# EAGLE board MCU_Power_PCB_Rev1 (EAGLE 9.6.2)

No outline drawn. Coordinates in mm, seen from the top.
Copper layers (1*16): Top 0.035mm / dielectric 1.5mm / Bottom 0.035mm
Design rules "default": minimum track width 6mil, minimum drill 0.35mm, track to track 6mil, track to pad 6mil, pad to pad 6mil, via to via 6mil, smd to smd 6mil, copper to edge 40mil, drill to drill 6mil, minimum pad ring 10mil, minimum via ring 8mil, stop-mask expansion 4mil, vias tented up to drill 0mil, thermal gap 10mil

## Footprints (pad centres in the part's own frame; a part is rotated, then mirrored left to right if it is on the bottom)
C0603 = smd 1.1 x 1: 1 -0.85,0; 2 0.85,0
LED5MM = drill 0.813 octagon: A -1.27,0; K 1.27,0
SOD-123_MINI-SMA = smd 1.5 x 2.1: A 1.8,0; C -1.8,0
M3_MOUNTING_HOLE = drill 0.5 pad 0.8: P$1 -2.4,0; P$2 0,2.4; P$3 2.4,0; P$4 0,-2.4; P$5 -1.697,1.697; P$6 1.697,1.697; P$7 1.697,-1.697; P$8 -1.697,-1.697 | drill 3.2 pad 6.4: P$10 0,0
SOIC127P600X175-14N = smd 1.525 x 0.65: 1 -2.712,3.81; 2 -2.712,2.54; 3 -2.712,1.27; 4 -2.712,0; 5 -2.712,-1.27; 6 -2.712,-2.54; 7 -2.712,-3.81; 8 2.712,-3.81; 9 2.712,-2.54; 10 2.712,-1.27; 11 2.712,0; 12 2.712,1.27; 13 2.712,2.54; 14 2.712,3.81
39303035 = drill 1.85 pad 2.775: 1 0,0; 2 -4.2,0; 3 -8.4,0 | hole 3.05: -8.4,-7.3; 0,-7.3
39303046 = drill 1.8 pad 2.7: 1 0,0; 2 -4.2,0; 3 -8.4,0; 4 -12.6,0 | hole 3: -12.6,-7.3; 0,-7.3
35222 = drill 2.54 pad 3.84: 1 -7.11,-1.85; 2 7.11,-1.85; 3 -2.03,-1.85; 4 2.03,-1.85
39-30-1020_1 = drill 1.85 pad 2.8: 1 0,13.9; 2 0,19.4 | hole 3.05: 0,6.6
413937885 = drill 1.1 pad 1.65: 1 -6.35,-2.54; 3 -1.27,-2.54; 4 1.27,-2.54; 5 3.81,-2.54; 6 6.35,-2.54; 7 6.35,2.54; 8 3.81,2.54; 9 1.27,2.54; 10 -1.27,2.54; 12 -6.35,2.54
PG-TO252-3-11 = smd 1.2 x 2.2: 1 -2.28,-8.3; 2 2.28,-8.3 | smd 5.8 x 6.4: 3 0,-2
SOT323 = smd 0.6 x 0.55: 1 -0.65,-0.925; 2 0.65,-0.925; 3 0,0.925
R0603 = smd 1 x 1.1: 1 -0.85,0; 2 0.85,0
SKHHA/D = drill 1 pad 1.5: 1 -2.25,-3.25; 2 -2.25,3.25; 3 2.25,-3.25; 4 2.25,3.25

## Placement (x,y rotation side)
C1  1 uF  [C0603]  -118.5,-212 0 top
C2  0.1 uF  [C0603]  -118.5,-215.5 0 top
D1  LED5MM  [LED5MM]  0.5,-16 0 top
D2  LED5MM  [LED5MM]  0.5,-23 0 top
D3  LED5MM  [LED5MM]  0.5,-30 0 top
D4  LED5MM  [LED5MM]  0.5,-37 0 top
D5  LED5MM  [LED5MM]  0.5,-44 0 top
D6  10.10V  [SOD-123_MINI-SMA]  0.5,-50.5 0 top
D7  10.00V  [SOD-123_MINI-SMA]  0.5,-56.5 0 top
D8  10.71V  [SOD-123_MINI-SMA]  0.5,-62.5 0 top
D9  11.38V  [SOD-123_MINI-SMA]  0.5,-68.5 0 top
D10  12.12V  [SOD-123_MINI-SMA]  0.5,-74.5 0 top
D11  12.00V  [SOD-123_MINI-SMA]  -86,-183 0 top
HOLE1  M3_MOUNTING_HOLE  [M3_MOUNTING_HOLE]  0,0 0 top
HOLE2  M3_MOUNTING_HOLE  [M3_MOUNTING_HOLE]  0,0 0 top
HOLE3  M3_MOUNTING_HOLE  [M3_MOUNTING_HOLE]  0,0 0 top
HOLE4  M3_MOUNTING_HOLE  [M3_MOUNTING_HOLE]  0,0 0 top
IC3  CD4011BM  [SOIC127P600X175-14N]  -104.5,-199.5 0 top
J1  39-30-3035  [39303035]  -7.5,-123 0 top
J2  39-30-3035  [39303035]  -23.5,-123 0 top
J3  39-30-3046  [39303046]  -19,-140.5 0 top
J4  3522-2  [35222]  -24.5,-157 0 top
J5  3522-2  [35222]  -32,-167.5 0 top
J6  39-30-0020  [39-30-1020_1]  -46.5,-172.5 0 top
J7  39-30-0020  [39-30-1020_1]  -55.5,-173 0 top
J8  39-30-0020  [39-30-1020_1]  -64.5,-173.5 0 top
J9  39-30-0020  [39-30-1020_1]  -73.5,-174 0 top
K1  V23079A1003B301  [413937885]  -111.5,-266.5 0 top
Q1  IPD90P03P4-04  [PG-TO252-3-11]  -113,-194.5 0 top
Q2  2N7002PW,115  [SOT323]  -118.5,-232 0 top
Q3  2N7002PW,115  [SOT323]  -118.5,-238.5 0 top
Q4  IPD90P03P4-04  [PG-TO252-3-11]  -82.5,-165 0 top
Q5  2N7002PW,115  [SOT323]  -118.5,-250.5 0 top
Q6  2N7002PW,115  [SOT323]  -88,-196 0 top
R1  1K  [R0603]  -1.5,-80 0 top
R2  1K  [R0603]  -1.5,-83.5 0 top
R3  1K  [R0603]  -1.5,-87 0 top
R4  1K  [R0603]  -1.5,-90.5 0 top
R5  1K  [R0603]  -1.5,-94 0 top
R6  100K  [R0603]  -1.5,-104.5 0 top
R7  100K  [R0603]  -118.5,-207 0 top
R8  100K  [R0603]  -118.5,-219 0 top
R9  [R0603]  -118.5,-224 0 top
R10  100K  [R0603]  -88,-177.5 0 top
R11  100K  [R0603]  -88,-202 0 top
R12  [R0603]  -118.5,-227.5 0 top
R13  100K  [R0603]  -118.5,-244.5 0 top
R14  10K  [R0603]  -118.5,-256.5 0 top
S1  SKHHA/D  [SKHHA/D]  2.5,-8.5 0 top

## Library data of the parts
C1 C2 R1-R14 = CASE-RCL
D1-D5 = CASE-LED
D6-D11 = diode
HOLE1-HOLE4 = RescueRunner
IC3 = CD4011BM; DESCRIPTION: Logic Gates Quad 2-Input; HEIGHT: 1.75mm; MANUFACTURER_NAME: Texas Instruments; MANUFACTURER_PART_NUMBER: CD4011BM; RS_PART_NUMBER: 2508238607; RS_PRICE-STOCK: http://uk.rs-online.com/web/p/products/2508238607
J1 J2 = 39-30-3035; ALLIED_NUMBER: 70266945; DESCRIPTION: Molex Mini-Fit Jr 5569, 3 Way, 1 Row, Right Angle PCB Header; HEIGHT: 5.8mm; MANUFACTURER_NAME: Molex; MANUFACTURER_PART_NUMBER: 39-30-3035; RS_PART_NUMBER: 6705849P; RS_PRICE-STOCK: http://uk.rs-online.com/web/p/products/6705849P
J3 = 39-30-3046; ALLIED_NUMBER: 70374137; DESCRIPTION: Molex MINI-FIT JR. Series, Series Number 5569, 4.2mm Pitch 4 Way 1 Row Right Angle PCB Header, Solder Termination, 12A; HEIGHT: 6.18mm; MANUFACTURER_NAME: Molex; MANUFACTURER_PART_NUMBER: 39-30-3046; RS_PART_NUMBER: 6705859P; RS_PRICE-STOCK: http://uk.rs-online.com/web/p/products/6705859P
J4 J5 = 3522-2; ALLIED_NUMBER: 70181615; DESCRIPTION: Double ATO 257 fuseholder,15A 500Vac Keystone 15A PCB Mount Fuse Holder for 5.2 x 0.64mm Automotive Fuse, 500 V ac; HEIGHT: 8mm; MANUFACTURER_NAME: Keystone Electronics; MANUFACTURER_PART_NUMBER: 3522-2; RS_PART_NUMBER: 1676068; RS_PRICE-STOCK: http://uk.rs-online.com/web/p/products/1676068
J6-J9 = 39-30-0020; ALLIED_NUMBER: 70266919; DESCRIPTION: MOLEX - 39-30-0020 - HEADER, MINI-FIT, R/A, DUAL ROW, 2WAY; HEIGHT: mm; MANUFACTURER_NAME: Molex; MANUFACTURER_PART_NUMBER: 39-30-0020; RS_PART_NUMBER: 6705708P; RS_PRICE-STOCK: http://uk.rs-online.com/web/p/products/6705708P
K1 = CASE-Relay; DESCRIPTION: DPDT non latch PCB relay, 5A 12Vdc coil; HEIGHT: 9mm; MANUFACTURER_NAME: TE Connectivity; MANUFACTURER_PART_NUMBER: V23079A1003B301; MOUSER_PART_NUMBER: 655-V23079A1003B301; MOUSER_PRICE-STOCK: https://www.mouser.com/Search/Refine.aspx?Keyword=655-V23079A1003B301
Q1 Q4 = IPD90P03P4-04; DESCRIPTION: MOSFET P-Channel 30V 90A TO252-3 Infineon IPD90P03P4-04 P-channel MOSFET Transistor, 90 A, 30 V, 3-Pin TO-252; HEIGHT: mm; MANUFACTURER_NAME: Infineon; MANUFACTURER_PART_NUMBER: IPD90P03P4-04
Q2 Q3 Q5 Q6 = CASE-Transistors
S1 = CASE-Switches

## Nets
+12V: IC3.14 J4.2 J4.4 J5.1 J5.3 Q1.2 S1.1 S1.2
A_OFF: IC3.3 IC3.5 IC3.6 R8.2 R9.2
A_ON: IC3.4 R7.2 R12.1
GND: C1.2 C2.2 D1.K IC3.7 J1.1 J2.1 J6.1 J7.1 J8.1 J9.1 K1.12 Q5.2 Q6.2 R6.1 R10.2 R11.2 R13.1
N$1: D6.A K1.1 Q5.1 R6.2
N$3: D2.A R2.1
N$4: D7.A Q6.1 R2.2 R11.1
N$5: D8.A R3.2
N$6: D9.A R4.2
N$7: D10.A R5.2
N$8: D3.A R3.1
N$9: D4.A R4.1
N$10: D5.A R5.1
N$11: Q1.1 R9.1 R12.2
N$12: D1.A Q6.3 R1.2
N$13: D2.K D3.K D4.K D5.K
N$14: Q2.1 Q3.1 Q5.3 R13.2 R14.1
N$15: C2.1 IC3.1 IC3.2 J3.2 K1.3 Q2.2 Q3.3 R7.1
N$16: D7.C D8.C D9.C D10.C R1.1 S1.3 S1.4
N$18: J1.3 Q4.3
N$19: D11.C J5.2 J5.4 Q4.2
N$20: D11.A Q4.1 R10.1
N$21: C1.1 J3.1 K1.4 Q2.3 Q3.2 R8.1
N$23: J2.2 J4.1 J4.3
VCC: D6.C J6.2 J7.2 J8.2 J9.2 Q1.3 R14.2

## Tracks (layer width: path | path; a pad name or v marks a point on that pad's centre or on a via)
+12V  (7 unrouted)
A_OFF  (4 unrouted)
A_ON  (2 unrouted)
GND  (16 unrouted)
N$1  (3 unrouted)
N$3  (1 unrouted)
N$4  (3 unrouted)
N$5  (1 unrouted)
N$6  (1 unrouted)
N$7  (1 unrouted)
N$8  (1 unrouted)
N$9  (1 unrouted)
N$10  (1 unrouted)
N$11  (2 unrouted)
N$12  (2 unrouted)
N$13  (3 unrouted)
N$14  (4 unrouted)
N$15  (7 unrouted)
N$16  (6 unrouted)
N$18  (1 unrouted)
N$19  (3 unrouted)
N$20  (2 unrouted)
N$21  (5 unrouted)
N$23  (2 unrouted)
VCC  (6 unrouted)